# Altium PCB RF Amplifier.PcbDoc
Units mil, origin at the board's own origin, x right, y up, seen from the top; angles counter-clockwise.
Board outline 3208.66 x 1377.95 mil, 4 copper layers (Top Layer, Int1 (GND), Int2 (PWR), Bottom Layer(GND)), stack 63.189 mil thick; 19 components, 13 nets, 54 pads, 103 vias.
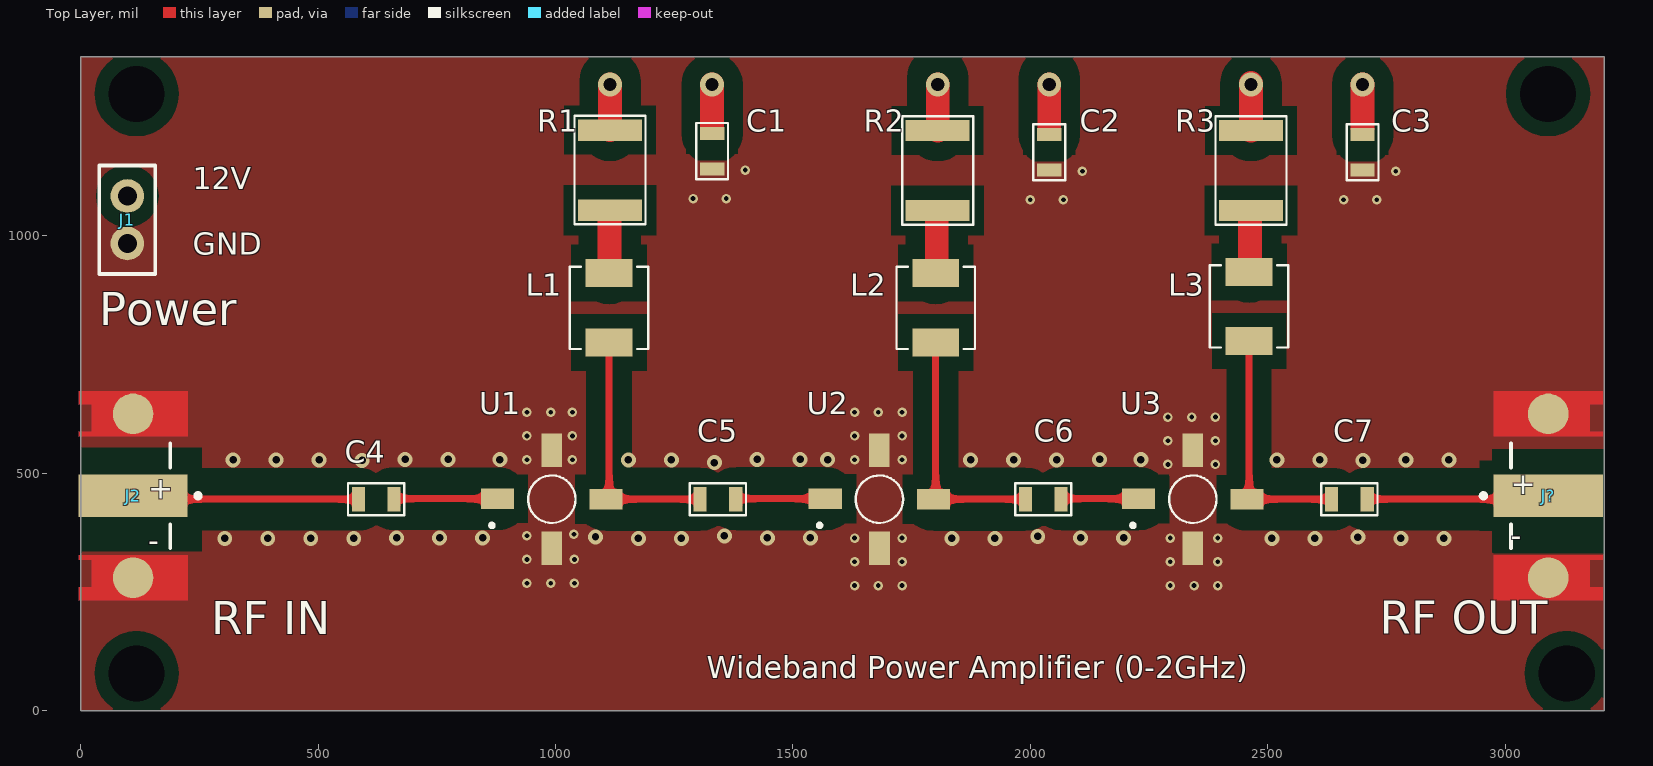
[diagram p0: Top Layer view]
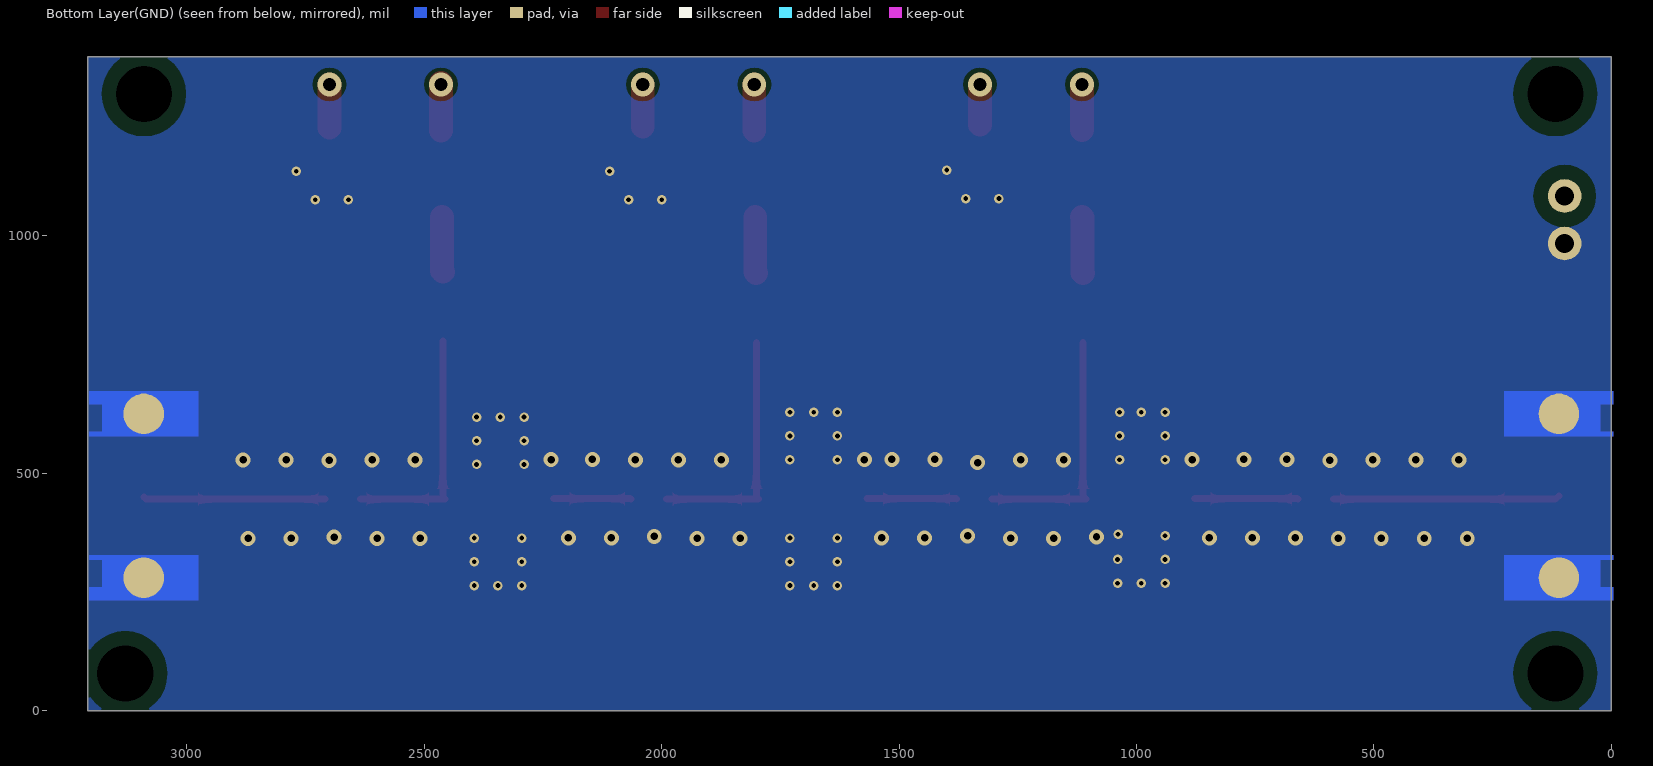
[diagram p1: Bottom Layer(GND) view, seen from below]
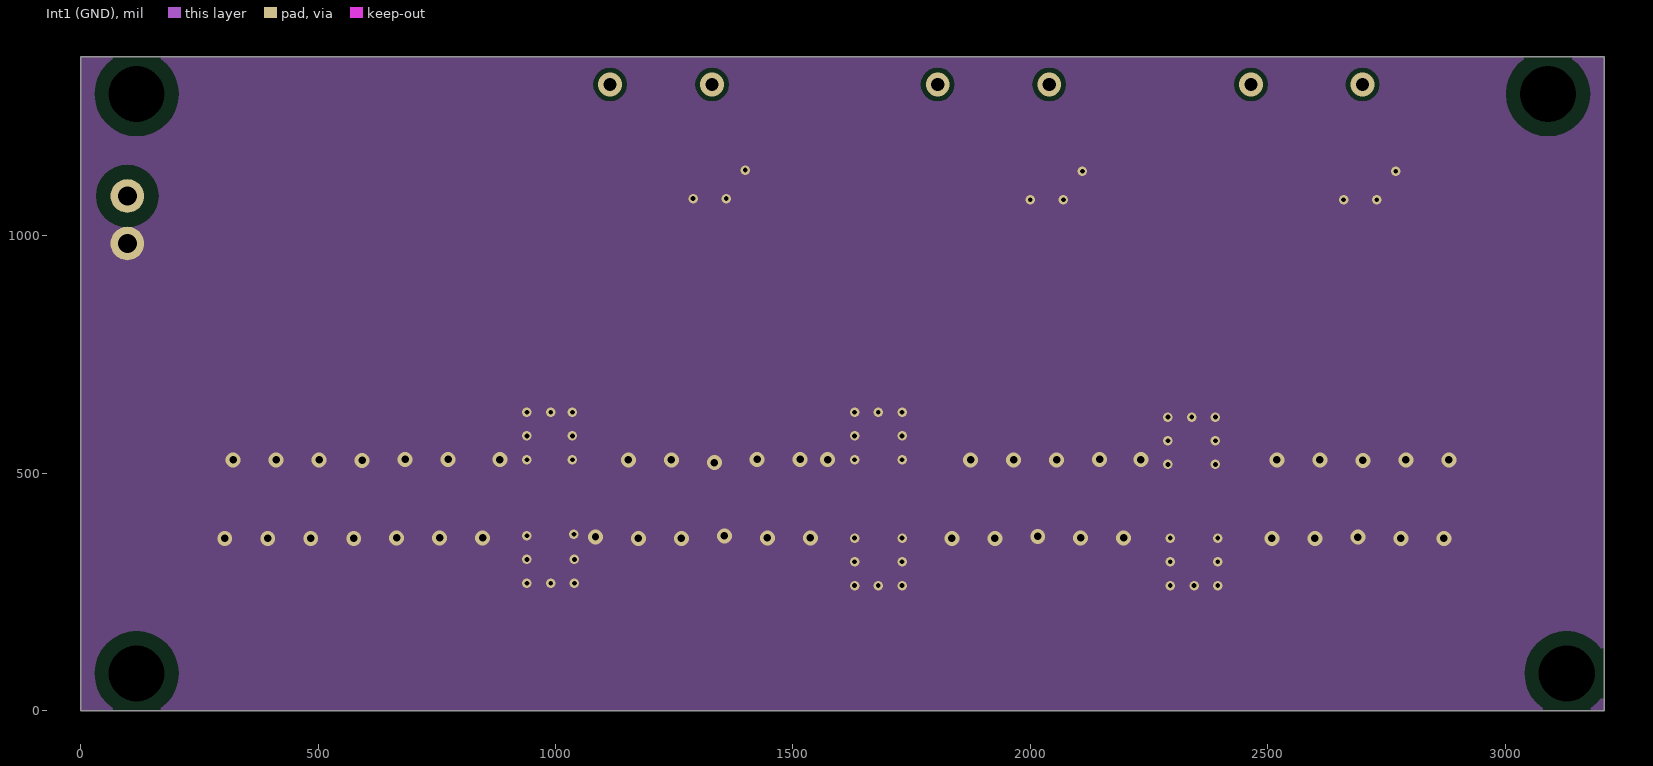
[diagram p2: Int1 (GND)]
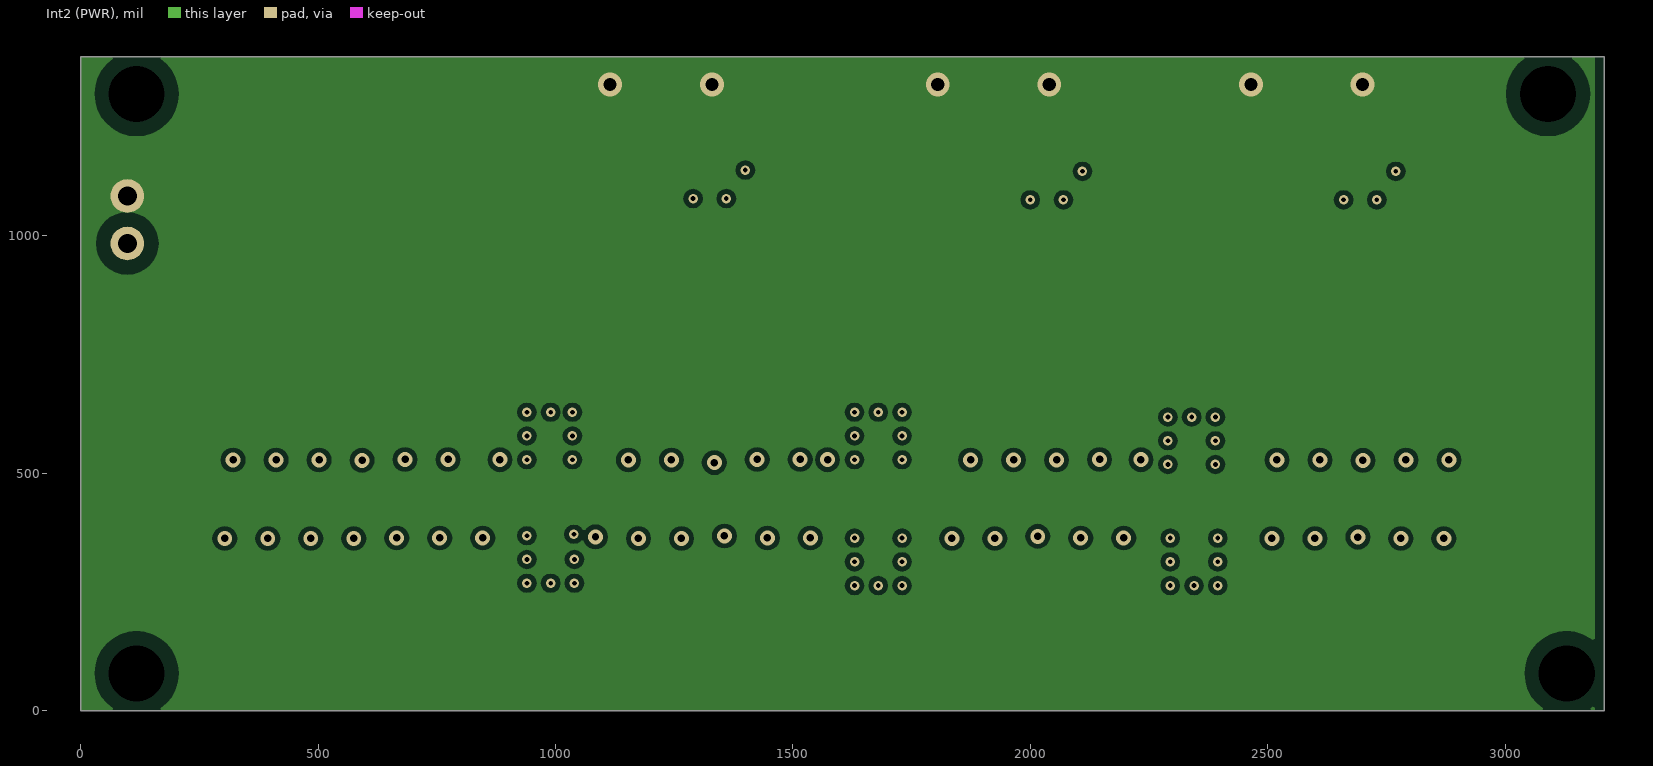
[diagram p3: Int2 (PWR)]

## Layer stack, top to bottom
Top Solder: solder mask 0.3937, SM-001, Dk 3.8
Top Layer: signal copper 1.378
Dielectric 2: prepreg 7.874, PP-017, Dk 4.2
Int1 (GND): signal copper 1.378
Dielectric 3: core 41.9291, Core-039, Dk 4.2
Int2 (PWR): signal copper 1.378
Dielectric 4: prepreg 7.874, PP-017, Dk 4.2
Bottom Layer(GND): signal copper 1.378
Bottom Solder: solder mask 0.3937, SM-001, Dk 3.8

## Board outline
0,1377.95 0,0 3208.66,0 3208.66,1377.95

## Design rules (kind name [scope] priority, off if disabled: settings)
Clearance Clearance_50 [All] p1: gap=10 ignorepadtopadclearanceinfootprint=FALSE except(0: Arc-Hole Track-Hole SMDPad-Hole THPad-Hole Via-Hole Fill-Hole Poly-Hole Region-Hole Text-Hole; 20: Arc-Arc Arc-Track Track-Track; 30: SMDPad-Fill SMDPad-Poly SMDPad-Region THPad-Fill THPad-Poly THPad-Region; 40: Arc-Fill Arc-Poly Arc-Region Track-Fill Track-Poly Track-Region; 60: Fill-Fill Fill-Poly Fill-Region Poly-Poly Poly-Region Region-Region)
Clearance [All] p2: gap=10 ignorepadtopadclearanceinfootprint=FALSE except(0: Arc-Hole Track-Hole SMDPad-Hole THPad-Hole Via-Hole Fill-Hole Poly-Hole Region-Hole Text-Hole; 20: Arc-Fill Arc-Poly Arc-Region Track-Fill Track-Poly Track-Region SMDPad-Fill SMDPad-Poly SMDPad-Region; 30: THPad-Fill THPad-Poly THPad-Region)
HoleToHoleClearance [All] p1 off: gap=10 allowstackedmicrovias=TRUE
PolygonConnect [All] p1: connectstyle=Direct reliefconductorwidth=10 reliefentries=4 polygonreliefangle="90 Angle" airgapwidth=10
RoutingVias [All] p1: holewidth=28 width=50 viastyle="Through Hole" minholewidth=28 minwidth=50 maxholewidth=28 maxwidth=50
SilkToSilkClearance [All] p1 off: silktosilkclearance=10
SilkToSolderMaskClearance [IsPad] p1 off: minsilkscreentomaskgap=10 clearancetoexposedcopper=TRUE
SolderMaskExpansion [All] p1: expansion=4 istentingtop=FALSE
Width Width_50 [InNetClass('S50')] p1: maxlimit=14.76 minlimit=10 preferedwidth=14.76 toplayer_minwidth=14.76 bottomlayer_minwidth=14.76 impedanceprofiledriven=TRUE impedanceprofileid={5A9BF34E-A3AD-4C6F-8625-617F591C98E5} impedanceprofilevalue=50.000000 minimp=50.000000 maximp=50.000000 favimp=50.000000
Width [All] p2: maxlimit=66 minlimit=10 preferedwidth=66 toplayer_minwidth=50 toplayer_prefwidth=50 midlayer1_maxwidth=10 midlayer1_prefwidth=10 midlayer2_maxwidth=10 midlayer2_prefwidth=10 minimp=50.000000 maximp=50.000000 favimp=50.000000
27 further rules are at their usual default settings.

## Classes and differential pairs
net class S50: NetC4_1 NetC4_2 NetC5_1 NetC5_2 NetC6_1 NetC6_2 NetC7_1 NetC7_2

## Components (designator, comment, footprint, x,y, rotation, side; value= is the part's Value field where it differs from the comment)
C1 "0.1uF" CAP805 1330,1178.74 r90 top
C2 "0.1uF" CAP805 2040,1176.14 r90 top
C3 "0.1uF" CAP805 2700,1176.14 r90 top
C4 "0.1uF" CAP805 622.32,445.63 r0 top
C5 "0.1uF" CAP805 1342.32,445.63 r0 top
C6 "0.1uF" CAP805 2027.32,445.63 r0 top
C7 "0.1uF" CAP805 2672.32,445.63 r0 top
J1 "2 Pin Header" Connector_2POS_2.54mm 98.43,1084.25 r270 top
J2 "SMA Connector" "Molex 73251-1150" -98.43,452.76 r0 top
J? "SMA Connector" "Molex 73251-1150" 3300,452.76 r180 top
L1 "22uH" INDUCtOR_SMD_4.2x4.4 1113,848.74 r270 top
L2 "22uH" INDUCtOR_SMD_4.2x4.4 1801,848.74 r270 top
L3 "22uH" INDUCtOR_SMD_4.2x4.4 2461,851.74 r270 top
R1 "536R" RES1812 1115,1138.74 r90 top
R2 "536R" RES1812 1805,1137.99 r90 top
R3 "536R" RES1812 2465,1137.99 r90 top
U1 "MAR-6+" VV105 992.32,445.63 r270 top
U2 "MAR-6+" VV105 1682.32,445.63 r270 top
U3 "MAR-6+" VV105 2342.32,445.63 r270 top

## Footprints (in the part's own frame and the unit in brackets; to place one, negate y for a bottom-side part, rotate by r counter-clockwise, add the part's x,y. Pads: shape width x height; smd on the part's side, far side on the other; paste and mask are expansions set on the pad)
CAP805 [mm]
  rect 0.7x1.3 smd: 1(-0.95,0) 2(0.95,0)
  silkscreen extent -1.5,-0.85 1.5,0.85, body extent -1,-0.6 1,0.6, height 0.45
Connector_2POS_2.54mm [mm]
  round 1.8 hole 1.02: 1(0,0) 2(2.54,0)
  silkscreen extent -1.64,-1.5 4.18,1.5
INDUCtOR_SMD_4.2x4.4 [mm]
  rect 1.5x2.5 smd: 1(-1.85,0) 2(1.85,0)
  silkscreen extent -2.2,-2.1 2.2,2.1
"Molex 73251-1150" [mil]
  rect 229.92x90.16 smd paste+0 mask+0: 1(209,0)
  round 85.57 smd paste+0 mask+0: 2(209,172.54) 3(209,-172.54)
  round 85.57 smd far side paste+0 mask+0: 4(209,172.54) 5(209,-172.54)
  Top Layer region: 94.04,220.08 323.96,220.08 323.96,125 94.04,125 94.04,135.04 121.99,135.04 121.99,192.52 94.04,192.52
  Top Layer region: 94.04,-220.08 323.96,-220.08 323.96,-125 94.04,-125 94.04,-135.04 121.99,-135.04 121.99,-192.52 94.04,-192.52
  Bottom Layer(GND) region: 94.04,220.08 323.96,220.08 323.96,125 94.04,125 94.04,135.04 121.99,135.04 121.99,192.52 94.04,192.52
  Bottom Layer(GND) region: 94.04,-220.08 323.96,-220.08 323.96,-125 94.04,-125 94.04,-135.04 121.99,-135.04 121.99,-192.52 94.04,-192.52
  silkscreen extent 288,-110 351,110, body extent -281,-187 281,188, height 179
RES1812 [mm]
  rect 1.14x3.42 smd: 1(-2.14,0) 2(2.14,0)
  silkscreen extent -2.9,-1.9 2.9,1.9
VV105 [mil]
  rect 43.62x70 smd: 1(-1,-114.17) 3(0,114.17)
  rect 70x43.62 smd: 2(103.17,0.04) 4(-103.17,-0.04)
  silkscreen extent -50,-130 59,50

## Part data
C1 C2 C3 C4 C5 C6 C7: library part Cap
L1 L2 L3: library part Inductor
R1 R2 R3: library part Res

## Free pads (board coordinates)
  round 60 hole 118.11: 24(118.11,1299.21) 24(3090.55,1299.21) 24(3129.92,78.74) 25(118.11,78.74)

## Via types
v1: diameter 20, hole 10, Top Layer to Bottom Layer(GND), 51 vias
v2: diameter 31.5, hole 15.75, Top Layer to Bottom Layer(GND), 46 vias
v3: diameter 50, hole 28, Top Layer to Bottom Layer(GND), 6 vias

## Nets (pads, with @x,y where several pads share a name; then routed paths per layer and width w, separated by ;. In a path a pad name is that pad's centre, name@x,y a point inside that pad or via, vN(x,y) a via of type N, cw(c..) or ccw(c..) an arc to the next point about the centre after c; other vN are vias at no path point)
+12: C1.2 C2.2 C3.2 J1.1 R1.2 R2.2 R3.2 | length 557.5
  Top Layer w50: R1.2 v3(1115,1319) ; 1330,1234 v3(1330,1319) ; R2.2 v3(1805,1319) ; 2040,1230 v3(2040,1319) ; R3.2 v3(2465,1319) v3@2465,1322 ; 2700,1228 v3(2700,1319)
GND: C1.1 C2.1 C3.1 J1.2 J2.2 J2.3 J2.4 J2.5 J?.2 J?.3 J?.4 J?.5 U1.2 U1.4 U2.2 U2.4 U3.2 U3.4
  other v1: 1630,263.74 1680,263.74 1730,263.74 2295,263.74 2345,263.74 2395,263.74 940,268.74 990,268.74 1040,268.74 1630,313.74 1730,313.74 2295,313.74 2395,313.74 940,318.74 1040,318.74 1630,363.74 1730,363.74 2295,363.74 2395,363.74 940,368.74 1039,371.74 2290,518.74 2390,518.74 940,528.74 1035.77,528.74 1630,528.74 1730,528.74 2290,568.74 2390,568.74 940,578.74 1035.77,578.74 1630,578.74 1730,578.74 2290,618.74 2340,618.74 2390,618.74 940,628.74 990,628.74 1035.77,628.74 1630,628.74 1680,628.74 1730,628.74 2000,1076.14 2070,1076.14 2660,1076.14 2730,1076.14 1290,1078.74 1360,1078.74 2110,1136.14 2770,1136.14 1400,1138.74
  other v2: 303.58,362.94 394.13,362.94 484.68,362.94 575.23,362.94 1174.92,362.94 1265.47,362.94 1834.86,362.94 1925.41,362.94 2508.93,362.94 2599.48,362.94 2780.5,362.94 2871.05,362.94 665.78,363.94 756.33,363.94 846.88,363.94 1446.33,363.94 1536.88,363.94 2106.33,363.94 2196.88,363.94 2689.99,365.62 1084.44,366.33 2015.85,367.5 1355.87,368.17 1334.66,522.61 592.85,527.54 2700.71,527.43 321.2,528.32 411.75,528.32 502.3,528.32 883.2,528.82 1153.73,528.32 1244.29,528.32 1573.2,528.82 1874.39,528.32 1964.95,528.32 2055.5,528.31 2233.2,528.82 2519.61,528.32 2610.16,528.32 2791.25,528.32 2881.81,528.32 683.38,529.32 773.93,529.32 1424.96,529.32 1515.51,529.32 2146.04,529.32
NetC4_1: C4.1 J2.1 | length 477.3
  Top Layer w14.76: J2.1 117.7,445.63 C4.1
NetC4_2: C4.2 U1.1 | length 218.8
  Top Layer w14.76: C4.2 660.72,446.63 U1.1
NetC5_1: C5.1 L1.2 U1.3 | length 531.4
  Top Layer w14.76: L1.2 1113,452.13 U1.3 C5.1
NetC5_2: C5.2 U2.1 | length 188.8
  Top Layer w14.76: C5.2 1380.72,446.63 U2.1
NetC6_1: C6.1 L2.2 U2.3 | length 525.6
  Top Layer w14.76: L2.2 1801,450.13 U2.3 C6.1
NetC6_2: C6.2 U3.1 | length 163.8
  Top Layer w14.76: C6.2 2065.72,446.63 U3.1
NetC7_1: C7.1 L3.2 U3.3 | length 513.6
  Top Layer w14.76: L3.2 2461,450.13 U3.3 C7.1
NetC7_2: C7.2 J?.1 | length 383.1
  Top Layer w14.76: C7.2 3086.63,445.63 J?.1@3091,450
NetL1_1: L1.1 R1.1 | length 119.3
  Top Layer w50: L1.1 1114,922.57 1114,1039 R1.1@1115,1040
NetL2_1: L2.1 R2.1 | length 119.3
  Top Layer w50: L2.1 1803,923.57 R2.1@1803,1040
NetL3_1: L3.1 R3.1 | length 116.3
  Top Layer w50: L3.1 2463,926.57 R3.1@2463,1040

## Polygon pours and split planes (outlines as drawn)
GND on Top Layer "Top Layer-GND 8" (solid, pour order 0): 920,388.74 1060,388.74 1060,248.74 920,248.74
GND on Top Layer "Top Layer-GND 7" (solid, pour order 6): 1060,504.74 920,504.74 920,648.74 1060,648.74
GND on Top Layer "Top Layer-GND 6" (solid, pour order 8): 1750,504.74 1610,504.74 1610,648.74 1750,648.74
GND on Top Layer "Top Layer-GND 5" (solid, pour order 10): 1610,387.74 1750,387.74 1750,243.74 1610,243.74
GND on Top Layer "Top Layer-GND 4" (solid, pour order 12): 2410,495 2270,495 2270,638.74 2410,638.74
GND on Top Layer "Top Layer-GND 3" (solid, pour order 14): 2275,387.74 2415,387.74 2415,243.74 2275,243.74
GND on Top Layer "GND_L01_P041" (solid, pour order 41): 0,1377.95 0,0 3208.66,0 3208.66,1377.95
GND on Top Layer "Top Layer-GND" (solid, pour order 32): 2610,1156.14 2790,1156.14 2790,1046.14 2610,1046.14
GND on Top Layer "Top Layer-GND 1" (solid, pour order 30): 1950,1156.14 2130,1156.14 2130,1046.14 1950,1046.14
GND on Top Layer "Top Layer-GND 2" (solid, pour order 24): 1240,1158.74 1420,1158.74 1420,1048.74 1240,1048.74
GND on Bottom Layer(GND) "GND_L04_P045" (solid, pour order 45): 0,1377.95 0,0 3208.66,0 3208.66,1377.95
GND on Int1 (GND) "GND_L02_P043" (solid, pour order 43): 0,1377.95 0,0 3208.17,0 3207.49,0.69 3207.49,1377.65
+12 on Int2 (PWR) "+12_L03_P044" (solid, pour order 44): 0,1377.95 0,0 3188.98,0 3188.98,1377.95

## Other copper
Top Layer:
  pour cut-out: 221 vertices and 0 holes, not listed, extent 1729.83,378.96 2294.82,513.3
  pour cut-out: 221 vertices and 0 holes, not listed, extent 51.03,378.96 944.82,513.3
  pour cut-out: 221 vertices and 0 holes, not listed, extent 1039.83,378.96 1634.82,513.3
  pour cut-out: 219 vertices and 0 holes, not listed, extent 2389.83,378.96 3150.09,512.3
  pour cut-out: 2972.49,551.44 3228.4,551.44 3228.4,331.08 2975.8,331.08 2972.49,334.39
  pour cut-out: 0,555 255.91,555 255.91,334.65 3.31,334.65 0,337.95

## Silkscreen, mask and mechanical layers (free items; w line width, h text height)
Top Overlay:
  text "12V" at 236.22,1082.68 h78.74
  text "GND" at 236.22,944.88 h78.74
  text "Power" at 39.37,788.39 h118.11
  text "+" at 3012.32,440.63 h78.74
  text "+" at 142.32,430.63 h78.74
  text "-" at 3012.32,330.63 h78.74
  text "-" at 142.32,320.63 h78.74
  text "RF OUT" at 2736.22,138.89 h118.11
  text "RF IN" at 275.59,137.8 h118.11
  text "Wideband Power Amplifier (0-2GHz)" at 1318.9,53 h78.74
Mechanical 10:
  the board outline again, w4.92
Mechanical 13:
  the board outline again, w4.92